# Altium PCB SM-sketch2.PcbDoc
Units mm, origin at the board's own origin, x right, y up, seen from the top; angles counter-clockwise.
Board outline 152.4 x 101.6 mm, 2 copper layers (Top Layer, Bottom Layer); 7 components, 0 nets, 37 pads, 0 vias.
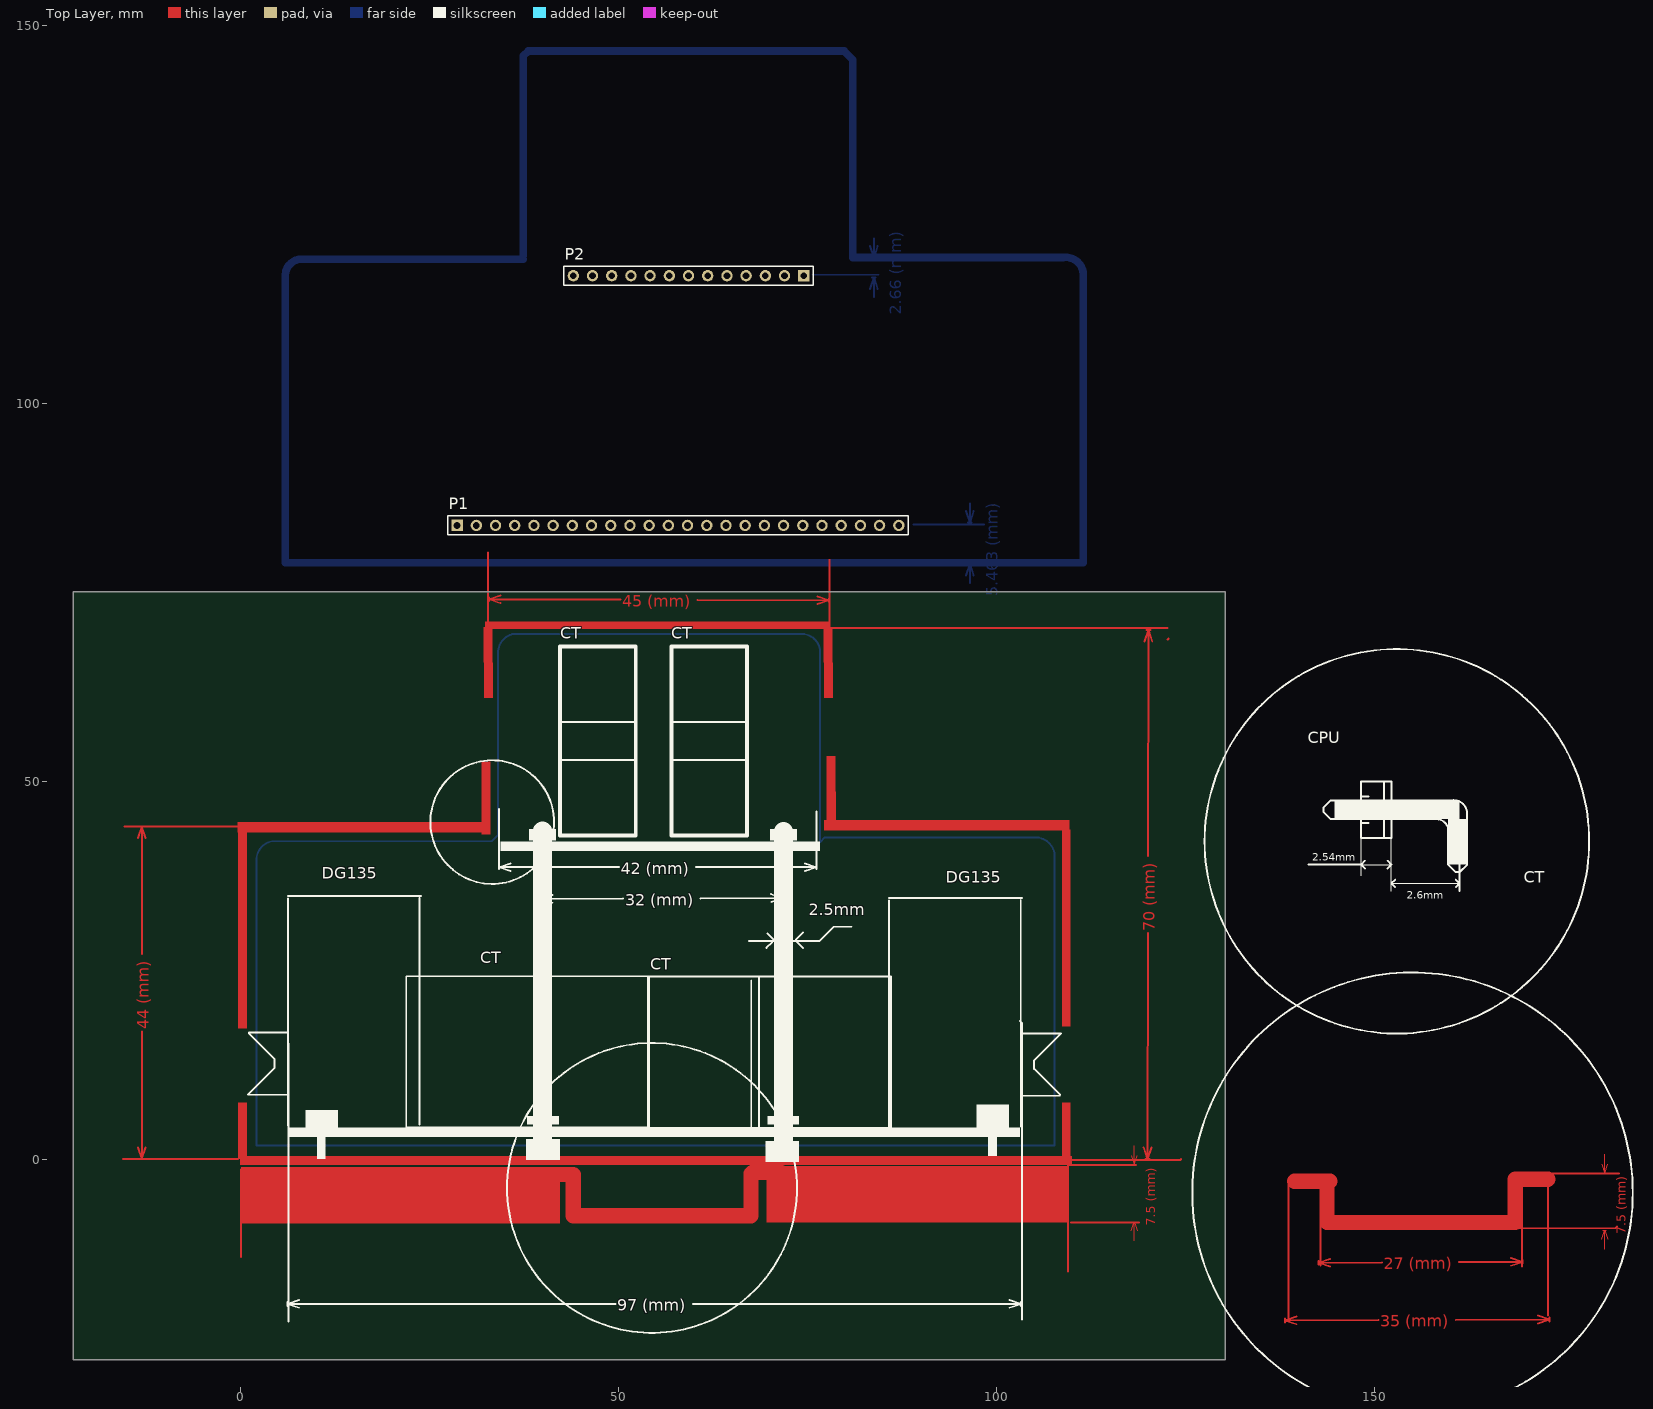
[diagram p0: Top Layer view]
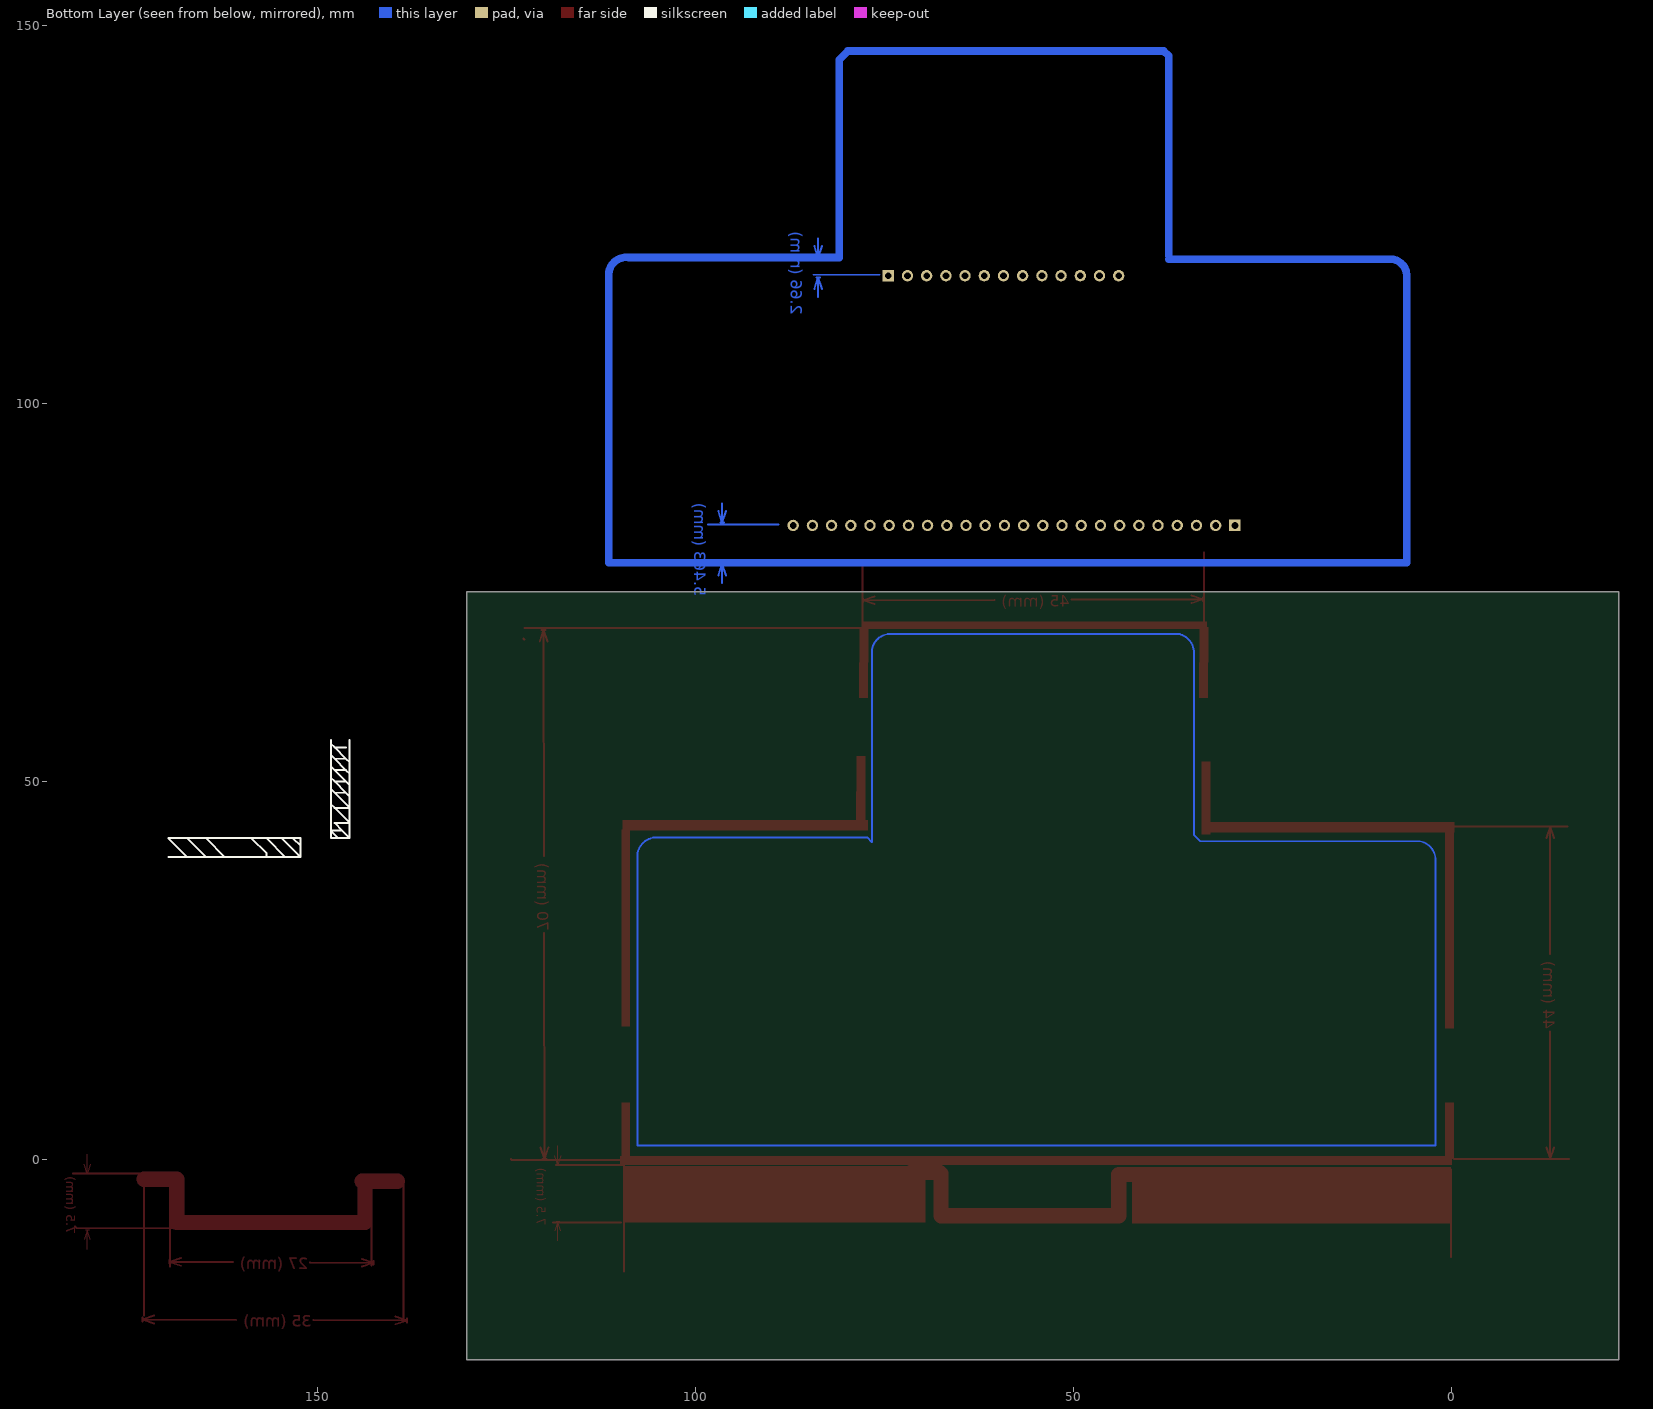
[diagram p1: Bottom Layer view, seen from below]

## Layer stack, top to bottom
Top Layer: signal copper 0.0356
Dielectric: dielectric 0.32, FR-4, Dk 4.8
Bottom Layer: signal copper 0.0356

## Board outline
-22.098,-26.543 130.302,-26.543 130.302,75.057 -22.098,75.057

## Design rules (kind name [scope] priority, off if disabled: settings)
Clearance [All] p1: gap=0.254
PolygonConnect [All] p1: connectstyle=Relief reliefconductorwidth=0.254 reliefentries=4 polygonreliefangle="90 Angle" airgapwidth=0.254
RoutingVias [All] p1: holewidth=0.711 width=1.27 viastyle="Through Hole" minholewidth=0.711 minwidth=1.27 maxholewidth=0.711 maxwidth=1.27
SolderMaskExpansion [All] p1: expansion=0.102
Width [All] p1: maxlimit=0.254 minlimit=0.254 preferedwidth=0.254
28 further rules are at their usual default settings.

## Components (designator, comment, footprint, x,y, rotation, side; value= is the part's Value field where it differs from the comment)
CT "Comment" CT-sketck1 67.056,42.799 r180 top
CT "Comment" CT-sketck1 52.324,42.799 r180 top
CT "Comment" "Heager right angle" 144.78,44.958 r0 top
CT "Comment" "Relay B30-sketch" 21.971,4.191 r0 top
CT "Comment" "Relay B30-sketch" 86.106,24.13 r180 top
P1 "Comment" HDR1X24 28.702,83.82 r0 top
P2 "Comment" HDR1X13 74.549,116.84 r180 top

## Footprints (in the part's own frame and the unit in brackets; to place one, negate y for a bottom-side part, rotate by r counter-clockwise, add the part's x,y. Pads: shape width x height; smd on the part's side, far side on the other; paste and mask are expansions set on the pad)
CT-sketck1 [mm]
  silkscreen extent 0,-25 10,0
HDR1X13 [mm] "Connector; Header; 13 Position"
  rect 1.5x1.5 hole 0.9: 1(0,0)
  round 1.5 hole 0.9: 2(2.54,0) 3(5.08,0) 4(7.62,0) 5(10.16,0) 6(12.7,0) 7(15.24,0) 8(17.78,0) 9(20.32,0) 10(22.86,0) 11(25.4,0) 12(27.94,0) 13(30.48,0)
  silkscreen extent -1.27,-1.27 31.75,1.27
HDR1X24 [mm] "Connector; Header; 24 Position"
  rect 1.5x1.5 hole 0.9: 1(0,0)
  round 1.5 hole 0.9: 2(2.54,0) 3(5.08,0) 4(7.62,0) 5(10.16,0) 6(12.7,0) 7(15.24,0) 8(17.78,0) 9(20.32,0) 10(22.86,0) 11(25.4,0) 12(27.94,0) 13(30.48,0) 14(33.02,0) 15(35.56,0) 16(38.1,0) 17(40.64,0) 18(43.18,0) 19(45.72,0) 20(48.26,0) 21(50.8,0) 22(53.34,0) 23(55.88,0) 24(58.42,0)
  silkscreen extent -1.27,-1.27 59.69,1.27
"Heager right angle" [mm]
  silkscreen extent -3.5,-9.5 17.5,5
"Relay B30-sketch" [mm]
  silkscreen extent 0,0 32,20

## Nets (pads, with @x,y where several pads share a name; then routed paths per layer and width w, separated by ;. In a path a pad name is that pad's centre, name@x,y a point inside that pad or via, vN(x,y) a via of type N, cw(c..) or ccw(c..) an arc to the next point about the centre after c; other vN are vias at no path point)
pads on no net: P1.1 P1.2 P1.3 P1.4 P1.5 P1.6 P1.7 P1.8 P1.9 P1.10 P1.11 P1.12 P1.13 P1.14 P1.15 P1.16 P1.17 P1.18 P1.19 P1.20 P1.21 P1.22 P1.23 P1.24 P2.1 P2.2 P2.3 P2.4 P2.5 P2.6 P2.7 P2.8 P2.9 P2.10 P2.11 P2.12 P2.13
copper on no net: | length 1286
  Top Layer w0.154: 117.837,-9.462 118.237,-8.262 ; 117.837,0.438 118.237,-0.762 ; 117.983,-8.262 118.491,-8.262 ; 117.983,-0.762 118.491,-0.762 ; 118.237,-10.802 118.237,-8.262 ; 118.237,1.778 118.237,-0.762 ; 118.637,-9.462 118.237,-8.262 ; 118.637,0.438 118.237,-0.762 ; 180.067,-10.605 180.467,-9.405 ; 180.067,-0.705 180.467,-1.905 ; 180.213,-9.405 180.721,-9.405 ; 180.213,-1.905 180.721,-1.905 ; 180.467,-11.945 180.467,-9.405 ; 180.467,0.635 180.467,-1.905 ; 180.867,-10.605 180.467,-9.405 ; 180.867,-0.705 180.467,-1.905
  Top Layer w0.254: -15.494,0 -0.254,0 ; -15.309,44 0.889,44 ; -13.508,1.524 -13,0 ; -13.508,42.476 -13,44 ; -13.254,0 -12.746,0 ; -13.254,44 -12.746,44 ; -13,16.896 -13,0 ; -13,27.104 -13,44 ; -12.492,1.524 -13,0 ; -12.492,42.476 -13,44 ; 0.127,-12.954 0.127,-1.397 ; 32.766,68.707 32.766,80.264 ; 32.892,73.787 32.894,74.295 ; 34.416,73.529 32.893,74.041 ; 34.418,74.545 32.893,74.041 ; 43.307,-1.143 44.069,-1.905 ; 50.289,73.992 32.893,74.041 ; 60.497,73.963 77.893,73.914 ; 76.368,73.41 77.893,73.914 ; 76.37,74.426 77.893,73.914 ; 76.835,70.231 122.682,70.231 ; 77.892,73.66 77.894,74.168 ; 77.978,68.707 77.978,79.248 ; 108.585,-0.127 124.333,-0.127 124.46,0 ; 109.474,-14.859 109.474,0 ; 109.492,-0.762 118.509,-0.762 ; 109.873,-8.382 118.89,-8.382 ; 119.51,1.525 120.015,0 ; 119.631,68.477 120.142,70 ; 119.761,0 120.269,0 ; 119.888,70 120.396,70 ; 120.069,29.896 120.015,0 ; 120.088,40.104 120.142,70 ; 120.526,1.523 120.015,0 ; 120.647,68.475 120.142,70 ; 122.682,68.707 122.809,68.834 ; 138.175,-21.082 138.177,-21.59 ; 138.684,-21.336 138.684,-2.921 ; 139.319,-3.048 139.446,-2.921 ; 139.698,-20.822 138.176,-21.336 ; 139.702,-21.838 138.176,-21.336 ; 142.62,-13.462 142.622,-13.97 ; 142.875,-14.097 142.875,-4.953 ; 144.143,-13.201 142.621,-13.716 ; 144.147,-14.217 142.621,-13.716 ; 150.572,-21.291 138.176,-21.336 ; 151.017,-13.677 142.621,-13.716 ; 160.78,-21.254 173.176,-21.209 ; 161.225,-13.628 169.621,-13.589 ; 168.095,-13.088 169.621,-13.589 ; 168.099,-14.104 169.621,-13.589 ; 169.164,-9.144 181.864,-9.144 182.118,-8.89 ; 169.545,-14.224 169.545,-6.223 ; 169.62,-13.335 169.622,-13.843 ; 171.65,-20.707 173.176,-21.209 ; 171.654,-21.723 173.176,-21.209 ; 172.593,-1.905 182.372,-1.905 ; 172.974,-20.701 172.974,-2.667 ; 173.175,-20.955 173.177,-21.463
  Top Layer w2: 39.243,-2.032 44.069,-2.032 44.069,-7.493 67.513,-7.493 ; 67.564,-7.493 67.564,-1.905 ; 67.691,-1.778 71.628,-1.778 ; 139.446,-2.921 144.145,-2.921 143.764,-3.302 143.764,-8.382 168.656,-8.382 168.656,-2.667 172.974,-2.667
  Bottom Layer w0.254: 2.159,39.497 cw(c4.674,39.561) 4.23,42.038 ; 2.159,39.751 2.159,1.778 107.696,1.778 107.696,40.513 ; 4.23,42.037 10.223,42.037 15.208,42.037 20.606,42.037 25.59,42.037 33.274,42.037 34.124,42.887 34.124,66.928 cw(c36.639,66.992) 36.195,69.469 ; 35.941,69.469 74.676,69.469 ; 37.084,119.126 37.465,119.507 ; 74.168,69.469 cw(c74.232,66.954) 76.709,67.398 ; 75.692,116.967 84.455,116.967 ; 76.708,67.398 76.708,41.91 77.343,42.545 105.664,42.545 ; 83.312,115.062 83.82,116.586 ; 83.312,120.77 83.82,119.246 ; 83.566,116.586 84.074,116.586 ; 83.566,119.246 84.074,119.246 ; 83.82,114.046 83.82,116.586 ; 83.82,121.786 83.82,119.246 ; 84.328,115.062 83.82,116.586 ; 84.328,120.77 83.82,119.246 ; 89.027,83.947 98.425,83.947 ; 96.012,77.216 96.52,78.74 ; 96.012,85.727 96.52,84.203 ; 96.266,78.74 96.774,78.74 ; 96.266,84.203 96.774,84.203 ; 96.52,76.2 96.52,78.74 ; 96.52,86.743 96.52,84.203 ; 97.028,77.216 96.52,78.74 ; 97.028,85.727 96.52,84.203 ; 105.156,42.545 cw(c105.22,40.03) 107.697,40.474
  Bottom Layer w1: 5.969,116.828 5.969,78.867 111.506,78.867 111.506,117.369 ; 5.97,116.772 cw(c8.175,116.828) 7.786,119 ; 8.128,118.999 37.465,118.999 ; 37.465,119.507 37.465,145.923 38.1,146.558 79.883,146.558 81.026,145.415 81.026,119.253 108.834,119.253 ; 109.156,119.263 cw(c109.215,116.962) 111.481,117.369

## Other copper
Top Layer:
  rectangle: 69.596,-8.389 109.347,-0.889
  rectangle: 0.127,-8.516 42.291,-1.016
  rectangle: 0,-0.762 110,0.381
  rectangle: -0.254,17.272 0.889,44
  rectangle: 108.712,17.526 109.855,43.619
  rectangle: -0.369,43.18 32.131,44.577
  rectangle: 77.216,43.434 109.716,44.831
  region: 33.097,52.574 31.894,52.569 31.939,42.956 33.142,42.961
  region: 78.75,53.342 77.547,53.337 77.591,43.938 78.794,43.943
  rectangle: 32.385,70.104 77.978,71.12
  rectangle: -0.254,0 0.889,7.493
  rectangle: 108.712,0 109.855,7.493
  region: 78.369,70.36 77.166,70.355 77.21,60.956 78.413,60.961
  region: 33.411,70.36 32.208,70.355 32.252,60.956 33.455,60.961
  text "45 (mm)" at 50.541,73.077 h1.52 r359.84
  text "70 (mm)" at 120.984,30.148 h1.52 r89.9
  text "44 (mm)" at -12.086,17.15 h1.52 r90
  text "7.5 (mm)" at 121.036,-8.811 h1.2 r90
  text "7.5 (mm)" at 183.266,-9.954 h1.2 r90
  text "27 (mm)" at 151.275,-14.589 h1.52 r0.27
  text "35 (mm)" at 150.829,-22.204 h1.52 r0.21
Bottom Layer:
  text "2.66 (mm)" at 87.477,111.67 h1.52 r90
  text "5.463 (mm)" at 100.177,74.463 h1.52 r90

## Silkscreen, mask and mechanical layers (free items; w line width, h text height)
Top Overlay:
  circle w0.254: c155.067,-4.445 r29.13
  circle w0.254: c54.483,-3.81 r19.172
  circle w0.254: c33.35,44.577 r8.179
  circle w0.254: c153.003,42.037 r25.432
  rectangle: 69.723,4.572 73.914,5.715
  rectangle: 69.469,-0.381 73.914,2.413
  rectangle: 70.104,42.164 73.66,43.688
  rectangle: 38.227,42.164 41.783,43.688
  rectangle: 37.846,-0.127 42.291,2.667
  rectangle: 37.973,4.572 42.164,5.715
  rectangle: 6.388,2.921 103.124,4.191
  rectangle: 10.16,0 11.303,5.715
  rectangle: 98.933,0.381 100.076,6.096
  rectangle: 97.409,3.937 101.727,7.239
  rectangle: 8.636,3.175 12.954,6.477
  rectangle: 34.417,40.767 76.708,42.037
  lines w0.254: 6.261,-19.406 6.261,-18.898 ; 6.35,4.445 6.35,34.445 ; 6.35,8.509 1.016,8.509 4.572,12.065 4.572,13.208 1.143,16.637 1.143,16.764 6.35,16.764 ; 6.35,34.798 23.91,34.798 ; 6.388,-21.463 6.388,15.278 ; 7.785,-19.66 6.261,-19.152 ; 7.785,-18.644 6.261,-19.152 ; 23.749,4.544 23.749,34.544 ; 34.221,38.354 34.221,38.862 ; 34.221,38.989 34.221,46.286 ; 35.745,38.1 34.221,38.608 ; 35.745,39.116 34.221,38.608 ; 39.769,34.663 39.771,34.155 ; 41.292,34.924 39.77,34.409 ; 41.296,33.908 39.77,34.409 ; 49.657,-19.152 6.261,-19.152 ; 50.117,38.608 34.221,38.608 ; 50.666,34.453 39.77,34.409 ; 59.865,-19.152 103.261,-19.152 ; 60.325,38.608 76.221,38.608 ; 60.874,34.493 71.77,34.536 ; 67.31,28.829 76.581,28.829 78.486,30.734 80.899,30.734 ; 69.596,27.94 70.358,28.702 70.358,28.829 ; 69.723,29.845 70.485,29.083 70.612,29.083 ; 70.244,35.038 71.77,34.536 ; 70.248,34.022 71.77,34.536 ; 71.769,34.79 71.771,34.282 ; 73.152,28.829 73.533,28.829 73.533,29.083 74.422,29.972 ; 73.66,28.829 73.66,28.702 74.422,27.94 ; 74.697,38.1 76.221,38.608 ; 74.697,39.116 76.221,38.608 ; 76.221,38.354 76.221,38.862 ; 76.221,38.989 76.221,45.953 ; 85.852,4.191 85.852,34.191 ; 85.852,34.544 103.412,34.544 ; 101.737,-19.66 103.261,-19.152 ; 101.737,-18.644 103.261,-19.152 ; 103.124,18.288 103.388,18.024 103.388,-21.209 ; 103.251,4.29 103.251,34.29 ; 103.251,8.382 108.458,8.382 ; 103.251,16.637 108.585,16.637 105.029,13.081 105.029,11.938 108.458,8.509 ; 103.261,-19.406 103.261,-18.898
  lines w2.5: 40.005,1.27 40.005,43.434 ; 71.882,1.143 71.882,43.307
  text "CPU" at 141.224,54.991 h1.52
  text "42 (mm)" at 50.371,37.694 h1.52
  text "DG135" at 10.795,37.084 h1.52
  text "DG135" at 93.345,36.576 h1.52
  text "32 (mm)" at 50.924,33.54 h1.52 r0.23
  text "2.5mm" at 75.184,32.258 h1.52
  text "97 (mm)" at 49.911,-20.066 h1.52

## Text inside footprints (layer, text, board x,y; h text height)
CT: Top Overlay "2.6mm" at 154.28,34.458 h1.02; Top Overlay "2.54mm" at 141.78,39.458 h1.02